# Altium PCB pcb2.PcbDoc
Units mil, origin at the board's own origin, x right, y up, seen from the top; angles counter-clockwise.
Board outline 780 x 1075 mil, 2 copper layers (Top Layer, Bottom Layer); 9 components, 8 nets, 19 pads, 0 vias.
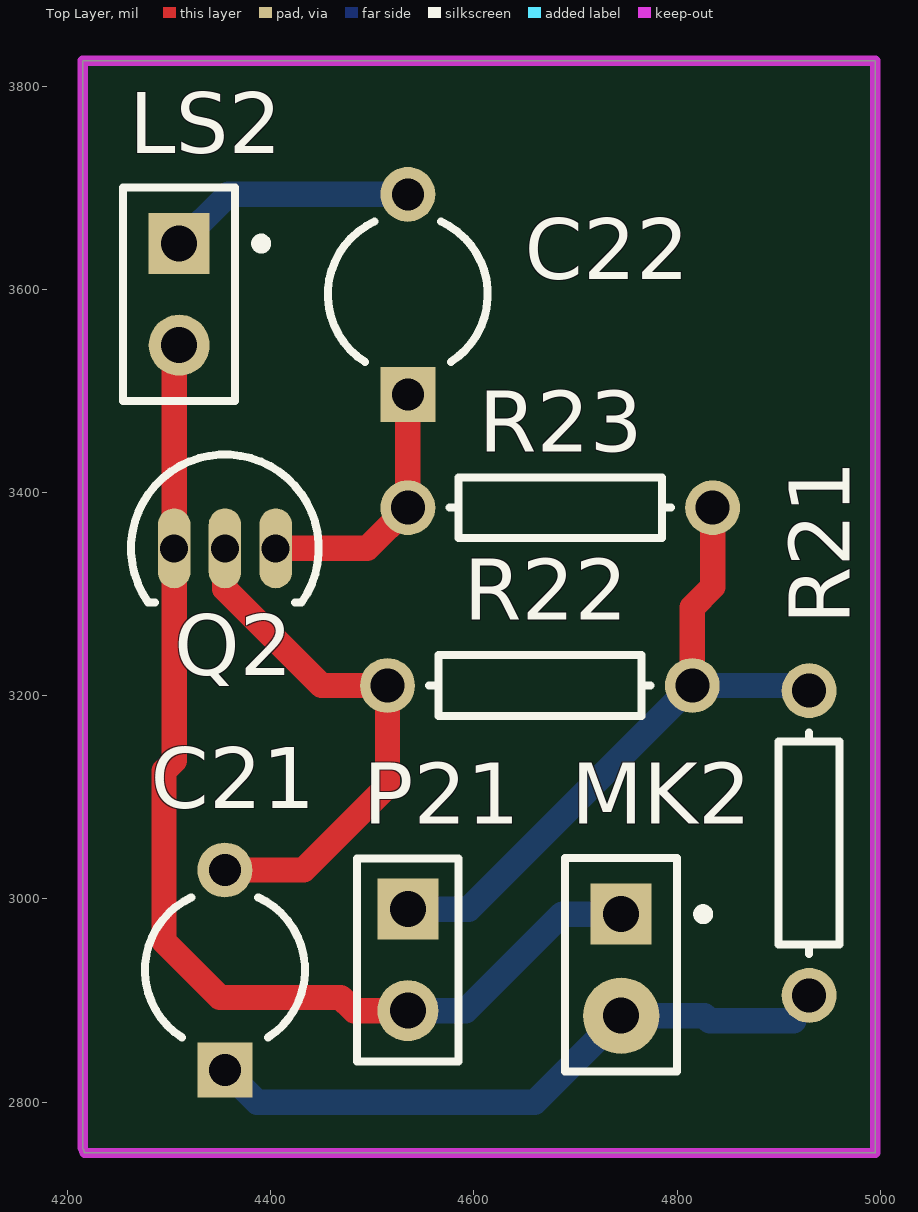
[diagram p0: Top Layer view]
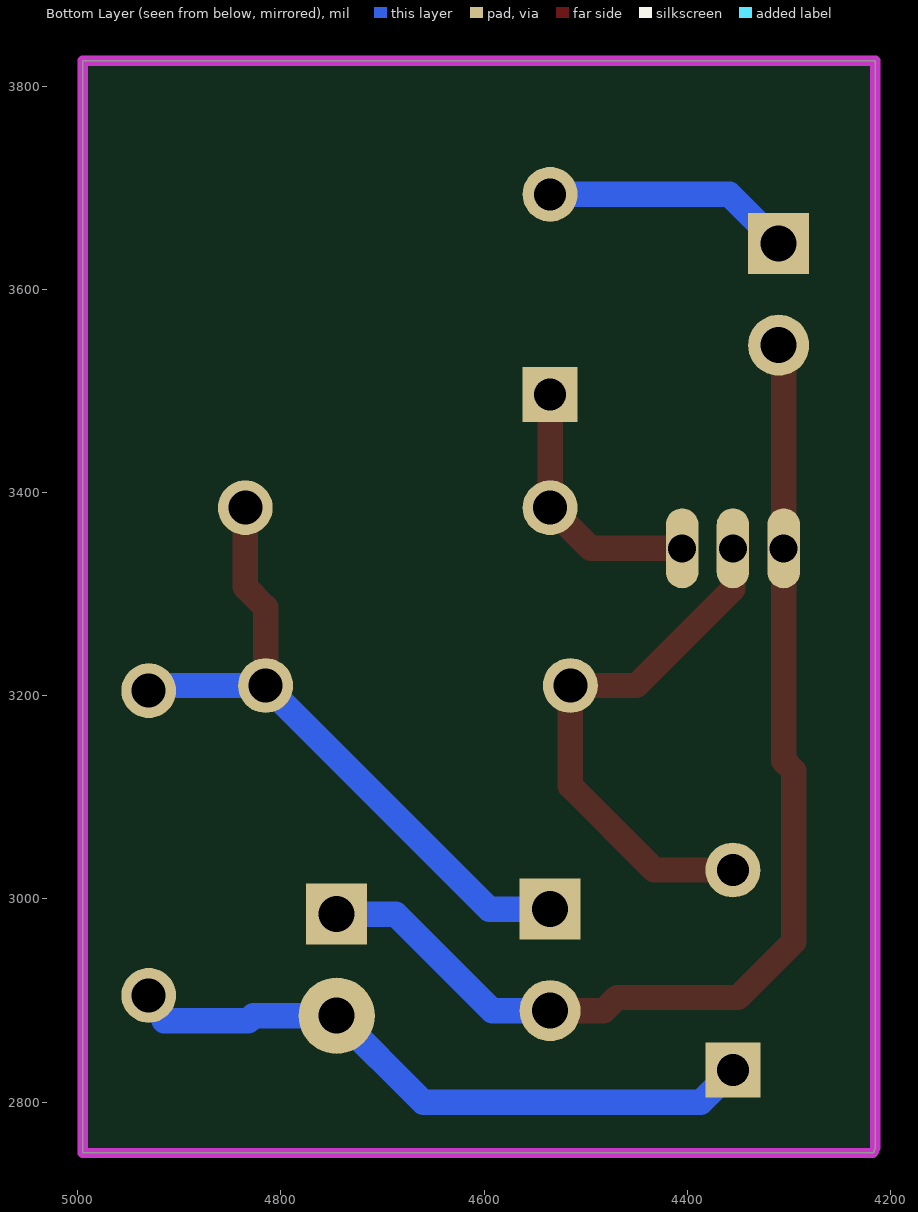
[diagram p1: Bottom Layer view, seen from below]

## Layer stack, top to bottom
Top Solder: solder mask 0.4, Solder Resist, Dk 3.5
Top Layer: signal copper 1.4
Dielectric 1: dielectric 12.6, FR-4, Dk 4.8
Bottom Layer: signal copper 1.4
Bottom Solder: solder mask 0.4, Solder Resist, Dk 3.5

## Board outline
4217,2750 4215,2755 4215,3825 4995,3825 4995,2750

## Design rules (kind name [scope] priority, off if disabled: settings)
Clearance [All] p1: gap=10 ignorepadtopadclearanceinfootprint=FALSE except(0: Arc-Hole Track-Hole SMDPad-Hole THPad-Hole Via-Hole Fill-Hole Poly-Hole Region-Hole Text-Hole)
PolygonConnect [All] p1: connectstyle=Relief reliefconductorwidth=10 reliefentries=4 polygonreliefangle="90 Angle" airgapwidth=10
RoutingVias [All] p1: holewidth=28 width=50 viastyle="Through Hole" minholewidth=28 minwidth=50 maxholewidth=28 maxwidth=50
SolderMaskExpansion [All] p1: expansion=4
Width [All] p1: maxlimit=25 minlimit=25 preferedwidth=25
30 further rules are at their usual default settings.

## Components (designator, comment, footprint, x,y, rotation, side; value= is the part's Value field where it differs from the comment)
C21 "Cap Pol2" CAPR5-4X5 4355,2930 r90 top value=1uF
C22 "Cap Pol2" CAPR5-4X5 4535,3595 r90 top value=10uF
LS2 "Speaker" PIN2#1 4310,3645 r270 top
MK2 "Mic2" PIN2#2 4745,2985 r270 top
P21 "5V_DC" HDR1X2 4535,2990 r270 top
Q2 "9014c" TO-92 4355,3345 r270 top
R21 "Res2" AXIAL-0.3 4930,3055 r90 top value=2KΩ
R22 "Res2" AXIAL-0.3 4665,3210 r0 top value=43KΩ
R23 "Res2" AXIAL-0.3 4685,3385 r0 top value=250Ω

## Footprints (in the part's own frame and the unit in brackets; to place one, negate y for a bottom-side part, rotate by r counter-clockwise, add the part's x,y. Pads: shape width x height; smd on the part's side, far side on the other; paste and mask are expansions set on the pad)
AXIAL-0.3 [mil] "Axial Device, Thru-Hole; 2 Leads; 0.3 in Pin Spacing"
  round 54 hole 33.46: 1(-150,0) 2(150,0)
  silkscreen extent -109,-30 109,30
CAPR5-4X5 [mil] "Capacitor; 2 Leads"
  rect 54x54 hole 31.5: 1(-98.43,0)
  round 54 hole 31.5: 2(98.43,0)
  silkscreen extent -66,-79 72,79
HDR1X2 [mil] "Connector; Header; 2 Position"
  rect 60x60 hole 35.43: 1(0,0)
  round 60 hole 35.43: 2(100,0)
  silkscreen extent -50,-50 150,50
PIN2#1 [mil] "Photosensitive Diode; 2 Leads"
  rect 60x60 hole 35.43: 1(0,0)
  round 60 hole 35.43: 2(100,0)
  silkscreen extent -55,-55 155,86
PIN2#2 [mil] "Photosensitive Diode; 2 Leads"
  rect 60x60 hole 35.43: 1(0,0)
  round 75 hole 35.43: 2(100,0)
  silkscreen extent -55,-55 155,86
TO-92 [mm] "TO, Flat Index; 3 In-Line, Axial Leads; Body Dia. 4.6mm; Leads 0.41 x 0.39 mm (max)"
  oval 2x0.813 hole 0.7: 1(0,1.27) 2(0,0) 3(0,-1.27)
  silkscreen extent -2.34,-2.34 1.35,2.34

## Part data
C21 C22: "Polarized Capacitor (Axial)", LatestRevisionDate=17-Jul-2002, LatestRevisionNote="Re-released for DXP Platform.", PackageDescription="Polarized Capacitor; 2 Leads", PackageReference=POLAR0.8, Published=8-Jun-2000, Publisher="Altium Limited"
LS2: "Loudspeaker", LatestRevisionDate=17-Jul-2002, LatestRevisionNote="Re-released for DXP Platform.", PackageReference=PIN2, Published=24-Mar-1999, Publisher="Altium Limited"
MK2: "Microphone", LatestRevisionDate=17-Jul-2002, LatestRevisionNote="Re-released for DXP Platform.", PackageReference=PIN2, Published=24-Mar-1999, Publisher="Altium Limited"
P21: library part "Header 2", "Header, 2-Pin", LatestRevisionDate=17-Jul-2002, LatestRevisionNote="Re-released for DXP Platform.", Publisher="Altium Limited"
Q2: library part NPN, "NPN Bipolar Transistor", Code_JEDEC=TO-226-AA, LatestRevisionDate=17-Jul-2002, LatestRevisionNote="Re-released for DXP Platform.", PackageDescription="TO, Flat Index; 3 In-Line, Axial Leads; Body Dia. 4.8mm; Leads 0.55 x 0.51 mm (max)", PackageReference=TO-226-AA, Published=8-Jun-2000, Publisher="Altium Limited"
R21 R22 R23: "Resistor", LatestRevisionDate=17-Jul-2002, LatestRevisionNote="Re-released for DXP Platform.", PackageDescription="Axial Device, Thru-Hole; 2 Leads; 0.4 in Pin Spacing", PackageReference=AXIAL-0.4, Published=8-Jun-2000, Publisher="Altium Limited"

## Nets (pads, with @x,y where several pads share a name; then routed paths per layer and width w, separated by ;. In a path a pad name is that pad's centre, name@x,y a point inside that pad or via, vN(x,y) a via of type N, cw(c..) or ccw(c..) an arc to the next point about the centre after c; other vN are vias at no path point)
GND: LS2.2 MK2.1 P21.2 Q2.3 | length 1110.7
  Top Layer w25: LS2.2 4305,3540 Q2.3 4305,3136 4295,3126 4295,2958 4350,2903 4469,2903 4482,2890 P21.2
  Bottom Layer w25: P21.2 4592,2890 4687,2985 MK2.1
NetC2_2: 
NetC21_1: C21.1 MK2.2 R21.1 | length 610.4
  Bottom Layer w25: C21.1 4386.57,2800 4660,2800 MK2.2 4827,2885 4832,2880 4915,2880
NetC21_2: C21.2 Q2.2 R22.1 | length 532.6
  Top Layer w25: C21.2 4432.43,3028.43 4515,3111 R22.1 4450,3210 4355,3305 Q2.2
NetC22_1: C22.1 Q2.1 R23.1 | length 258.1
  Top Layer w25: Q2.1 4495,3345 R23.1 C22.1
NetC22_2: C22.2 LS2.1 | length 245.1
  Bottom Layer w25: LS2.1 4358.43,3693.43 C22.2
NetLS1_2: 
VCC: P21.1 R21.2 R22.2 R23.2 | length 671.5
  Top Layer w25: R22.2 4815,3287 4835,3307 R23.2
  Bottom Layer w25: P21.1 4595,2990 R22.2 4925,3210 R21.2

## Keep-outs
Keep-Out Layer:
  lines w10: 4215,2755 4217,2750 4995,2750 4995,3825 4215,3825 4215,3775 4215,2755